# EAGLE board CircuitoControle (EAGLE 9.1.0)
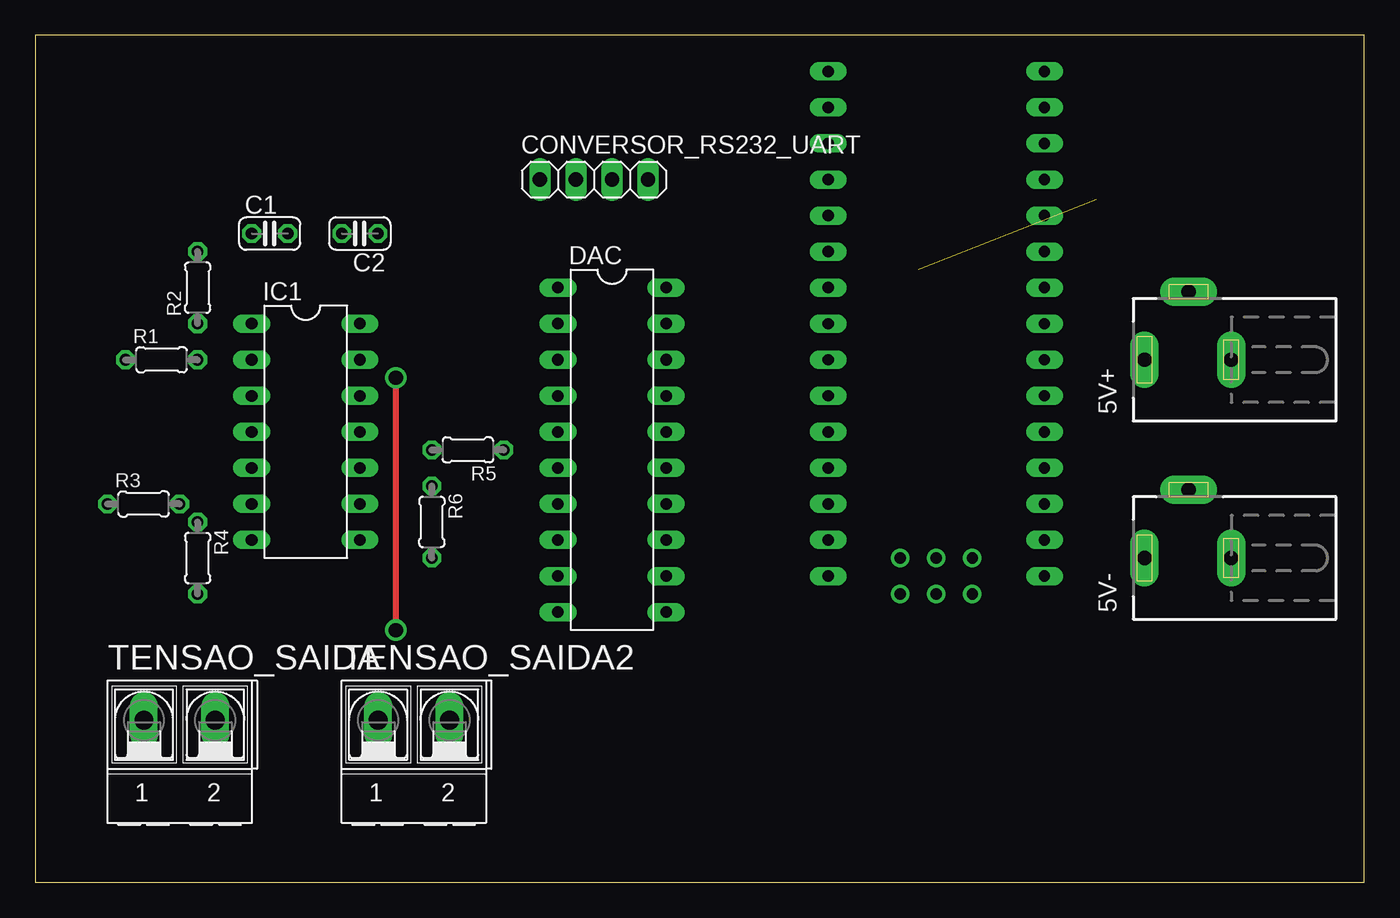
[diagram p0: board, top side]
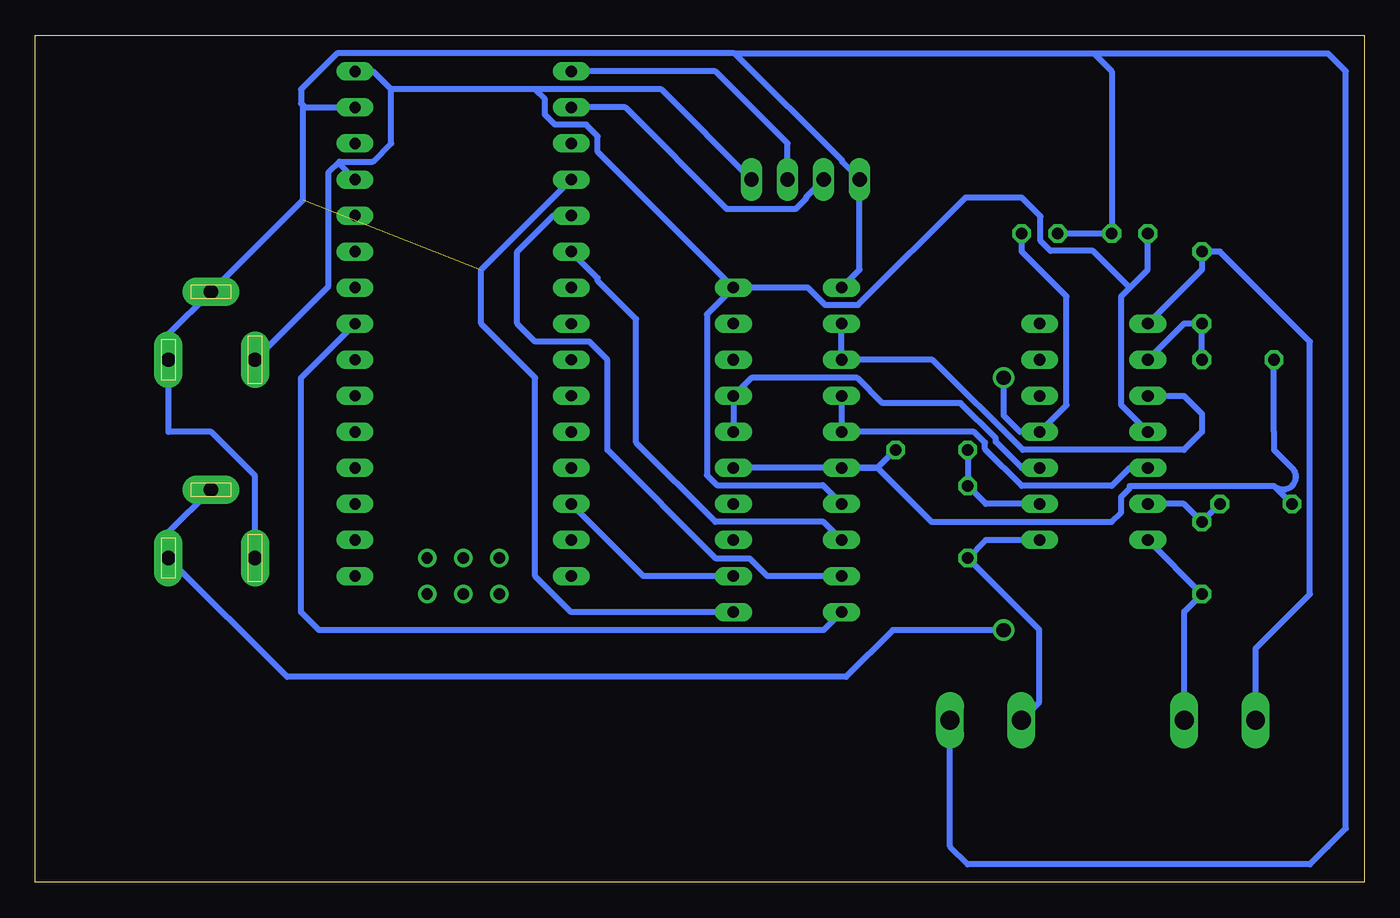
[diagram p1: board, bottom side, seen from below]

Size 93.65 x 59.68 mm. Coordinates in mm from the lower left corner, seen from the top.
Outline: 0,0 93.65,0 93.65,59.68 0,59.68 0,0
Copper layers (1*16): Top 0.035mm / dielectric 1.5mm / Bottom 0.035mm
Design rules "default *": minimum track width 16mil, minimum drill 0.35mm, track to track 14mil, track to pad 14mil, pad to pad 14mil, via to via 14mil, smd to smd 14mil, copper to edge 40mil, drill to drill 6mil, minimum pad ring 10mil, minimum via ring 8mil, stop-mask expansion 4mil, vias tented up to drill 0mil, thermal gap 10mil

## Footprints (pad centres in the part's own frame; a part is rotated, then mirrored left to right if it is on the bottom)
DCJ0202 = drill 1 pad 2 long: 1 0,3.1; 2 4.8,0; 3 0,-3
C025-024X044 = drill 0.813 octagon: 1 -1.27,0; 2 1.27,0
1X04 = drill 1.016 long: 1 -3.81,0; 2 -1.27,0; 3 1.27,0; 4 3.81,0
DIL20 = drill 0.813 long: 1 -11.43,-3.81; 2 -8.89,-3.81; 3 -6.35,-3.81; 4 -3.81,-3.81; 5 -1.27,-3.81; 6 1.27,-3.81; 7 3.81,-3.81; 8 6.35,-3.81; 9 8.89,-3.81; 10 11.43,-3.81; 11 11.43,3.81; 12 8.89,3.81; 13 6.35,3.81; 14 3.81,3.81; 15 1.27,3.81; 16 -1.27,3.81; 17 -3.81,3.81; 18 -6.35,3.81; 19 -8.89,3.81; 20 -11.43,3.81
DIL14 = drill 0.813 long: 1 -7.62,-3.81; 2 -5.08,-3.81; 3 -2.54,-3.81; 4 0,-3.81; 5 2.54,-3.81; 6 5.08,-3.81; 7 7.62,-3.81; 8 7.62,3.81; 9 5.08,3.81; 10 2.54,3.81; 11 0,3.81; 12 -2.54,3.81; 13 -5.08,3.81; 14 -7.62,3.81
0204/5 = drill 0.813 octagon: 1 -2.54,0; 2 2.54,0
NANO = drill 0.8 long: 3.3V -10.16,24.13; 5V -10.16,-1.27; A0 -10.16,19.05; A1 -10.16,16.51; A2 -10.16,13.97; A3 -10.16,11.43; A4 -10.16,8.89; A5 -10.16,6.35; A6 -10.16,3.81; A7 -10.16,1.27; AREF -10.16,21.59; D2 5.08,1.27; D3 5.08,3.81; D4 5.08,6.35; D5 5.08,8.89; D6 5.08,11.43; D7 5.08,13.97; D8 5.08,16.51; D9 5.08,19.05; D10 5.08,21.59; D11 5.08,24.13; D12 5.08,26.67; D13 -10.16,26.67; GND -10.16,-6.35; GND1 5.08,-1.27; RAW -10.16,-8.89; RST -10.16,-3.81; RST1 5.08,-3.81; RX1 5.08,-6.35; TX0 5.08,-8.89 | drill 0.8: ICSP1 -5.08,-10.16; ICSP2 -5.08,-7.62; ICSP3 -2.54,-10.16; ICSP4 -2.54,-7.62; ICSP5 0,-10.16; ICSP6 0,-7.62
AK500/2-H = drill 1.321 long: 1 -2.515,0; 2 2.515,0

## Placement (x,y rotation side)
5V+  DCJ0202  [DCJ0202]  81.28,36.83 90 top
5V-  DCJ0202  [DCJ0202]  81.28,22.86 90 top
C1  0,1uF  [C025-024X044]  16.51,45.72 0 top
C2  [C025-024X044]  22.86,45.72 180 top
CONVERSOR_RS232_UART  [1X04]  39.37,49.53 0 top
DAC  [DIL20]  40.64,30.48 270 top
IC1  TL074P  [DIL14]  19.05,31.75 270 top
R1  10k  [0204/5]  8.89,36.83 0 top
R2  10k  [0204/5]  11.43,41.91 90 top
R3  10k  [0204/5]  7.62,26.67 0 top
R4  10k  [0204/5]  11.43,22.86 270 top
R5  10k  [0204/5]  30.48,30.48 180 top
R6  10k  [0204/5]  27.94,25.4 270 top
STM32  NANO  [NANO]  66.04,30.48 0 top
TENSAO_SAIDA  [AK500/2-H]  10.16,11.43 0 top
TENSAO_SAIDA2  [AK500/2-H]  26.67,11.43 0 top

## Library data of the parts
5V+ 5V- = con-jack; OC_FARNELL: unknown; OC_NEWARK: unknown
C1 C2 = resistor
CONVERSOR_RS232_UART = pinhead
DAC = ic-package
IC1 = linear3
R1-R6 = rcl; SPICEPREFIX: R
STM32 = Arduino-clone
TENSAO_SAIDA TENSAO_SAIDA2 = con-ptr500; OC_FARNELL: unknown; OC_NEWARK: unknown

## Nets
2,5V: DAC.6 DAC.15 R1.1 R3.1 R5.1
+5V: 5V+.1 C1.1 CONVERSOR_RS232_UART.4 DAC.7 DAC.20 IC1.4 STM32.D9
-5V: 5V-.2 5V-.3 C2.1 IC1.11
GND: 5V+.2 5V+.3 5V-.1 C1.2 C2.2 CONVERSOR_RS232_UART.1 DAC.1 DAC.11 STM32.A0 STM32.D11 TENSAO_SAIDA2.2
MISO: DAC.12 STM32.RST
MOSI: DAC.9 STM32.A1
N$1: IC1.6 R3.2 R4.1
N$2: IC1.2 R1.2 R2.1
N$4: IC1.9 R5.2 R6.1
OUTA: DAC.2 DAC.3 IC1.3
OUTB: DAC.4 DAC.5 IC1.5
OUTC: DAC.16 DAC.17 IC1.10
RX: CONVERSOR_RS232_UART.2 STM32.3.3V
SCK: DAC.10 STM32.D5
SS: DAC.8 STM32.A2
TX: CONVERSOR_RS232_UART.3 STM32.D13
VX: IC1.1 R2.2 TENSAO_SAIDA.1
VY: IC1.7 R4.2 TENSAO_SAIDA.2
VZ: IC1.8 R6.2 TENSAO_SAIDA2.1

## Tracks (layer width: path | path; a pad name or v marks a point on that pad's centre or on a via)
2,5V
  Bottom 0.406: DAC.6 DAC.15 | R1.1 6.35,31.75 6.35,30.48 5.08,29.21 arc180 6.35,27.94 | R5.1 34.29,29.21 | 34.29,29.21 DAC.6 | DAC.6 34.29,29.21 | 34.29,29.21 30.48,25.4 17.78,25.4 17.12,26.06 17.12,27.17 16.51,27.78 16.51,27.94 6.35,27.94 | 6.35,27.94 R3.1
+5V
  Bottom 0.406: 5V+.1 72.99,42.02 72.99,50.03 72.22,50.8 | 72.22,50.8 69.85,50.8 68.58,52.07 68.58,55.88 | 68.58,55.88 69.85,57.15 71.12,57.15 | CONVERSOR_RS232_UART.4 49.53,55.88 58.42,55.88 | 58.42,55.88 68.58,55.88 | DAC.20 54.01,51.47 54.01,52.57 54.84,53.4 57.04,53.4 57.75,54.11 57.75,55.21 58.42,55.88 | IC1.4 17.12,33.63 17.12,41.3 16.51,41.91 | 16.51,41.91 15.24,43.18 C1.1 | 16.51,41.91 19.1,44.5 22.09,44.5 22.81,45.21 22.81,46.94 24.13,48.26 28.09,48.26 35.66,40.69 37.99,40.69 39.21,41.91 DAC.20 | DAC.7 38.15,27.99 45.62,27.99 46.33,28.7 46.33,40.03 DAC.20 | 72.22,50.8 72.22,50.63 STM32.D9
-5V  (via drill 1)
  Top 0.406: v25.4,35.56 v25.4,17.78
  Bottom 0.406: 5V-.2 84.28,24.66 5V-.3 75.9,14.48 36.51,14.48 33.21,17.78 v25.4,17.78 | C2.1 24.13,44.45 20.98,41.3 20.98,33.63 IC1.11 24.25,31.75 25.4,32.9 v25.4,35.56
GND  (1 unrouted)
  Bottom 0.406: C2.2 C1.2 17.78,57.15 19.05,58.42 | 5V-.1 78.18,28.65 81.28,31.75 84.28,31.75 5V+.3 84.28,38.63 5V+.2 74.79,48.12 74.79,54.75 | 44.36,58.42 36.78,50.84 36.78,50.75 CONVERSOR_RS232_UART.1 35.56,43.18 DAC.1 | 74.79,54.75 74.93,54.89 74.93,55.88 72.39,58.42 44.36,58.42 | 74.79,54.75 74.65,54.61 STM32.D11 | 44.36,58.42 19.05,58.42 | 19.05,58.42 2.54,58.42 1.27,57.15 1.27,3.81 2.54,2.54 3.81,1.27 27.94,1.27 29.18,2.52 29.18,2.54 TENSAO_SAIDA2.2 | DAC.11 55.88,19.05 58.42,21.59 58.42,35.56 62.23,39.37 62.23,43.18 STM32.A0
MISO
  Bottom 0.406: DAC.12 50.8,21.59 STM32.RST
MOSI
  Bottom 0.406: DAC.9 42.06,21.59 43.28,22.81 45.67,22.81 53.34,30.48 53.34,36.83 54.61,38.1 58.42,38.1 59.69,39.37 59.69,44.45 57.15,46.99 STM32.A1
N$1
  Bottom 0.406: IC1.6 12.7,26.67 R4.1 R3.2
N$2
  Bottom 0.406: IC1.2 12.7,39.37 R2.1 R1.2
N$3  (via drill 0.7)
  other vias: 25.4,17.78
N$4
  Bottom 0.406: IC1.9 26.67,26.67 R6.1 R5.2
N$5  (via drill 0.7)
  other vias: 25.4,35.56
OUTA
  Bottom 0.406: DAC.2 DAC.3 30.41,36.83 24.06,30.48 12.7,30.48 11.43,31.75 11.43,33.02 12.7,34.29 IC1.3
OUTB
  Bottom 0.406: DAC.4 DAC.5 27.49,31.75 26.72,30.98 26.72,30.53 24.13,27.94 17.78,27.94 16.51,29.21 IC1.5
OUTC
  Bottom 0.406: DAC.16 DAC.17 43.18,35.56 35.71,35.56 33.94,33.78 28.44,33.78 25.96,31.3 25.96,31.04 24.13,29.21 IC1.10
RX
  Bottom 0.406: CONVERSOR_RS232_UART.2 39.32,48.31 39.32,48.22 40.09,47.45 44.91,47.45 52.07,54.61 STM32.3.3V
SCK
  Bottom 0.406: DAC.10 38.1,17.78 73.66,17.78 74.93,19.05 74.93,35.56 STM32.D5
SS
  Bottom 0.406: DAC.8 38.1,25.4 45.72,25.4 51.31,30.99 51.31,39.69 54.01,42.39 54.01,42.58 STM32.A2
TX
  Bottom 0.406: CONVERSOR_RS232_UART.3 40.64,52.07 45.72,57.15 STM32.D13
VX
  Bottom 0.406: IC1.1 11.43,43.18 R2.2 10.16,44.45 3.81,38.1 3.81,20.32 7.64,16.48 TENSAO_SAIDA.1
VY
  Bottom 0.406: IC1.7 R4.2 12.67,19.08 TENSAO_SAIDA.2
VZ
  Bottom 0.406: IC1.8 26.67,24.13 R6.2 22.88,17.8 22.88,12.7 TENSAO_SAIDA2.1